# Altium PCB PCB-parking-automation-project-avr-melec-ir.PcbDoc
Units mm, origin at the board's own origin, x right, y up, seen from the top; angles counter-clockwise.
Board outline 120 x 100 mm, 4 copper layers (Top Layer, Internal Plane 1, Internal Plane 2, Bottom Layer); 31 components, 30 nets, 146 pads, 0 vias.
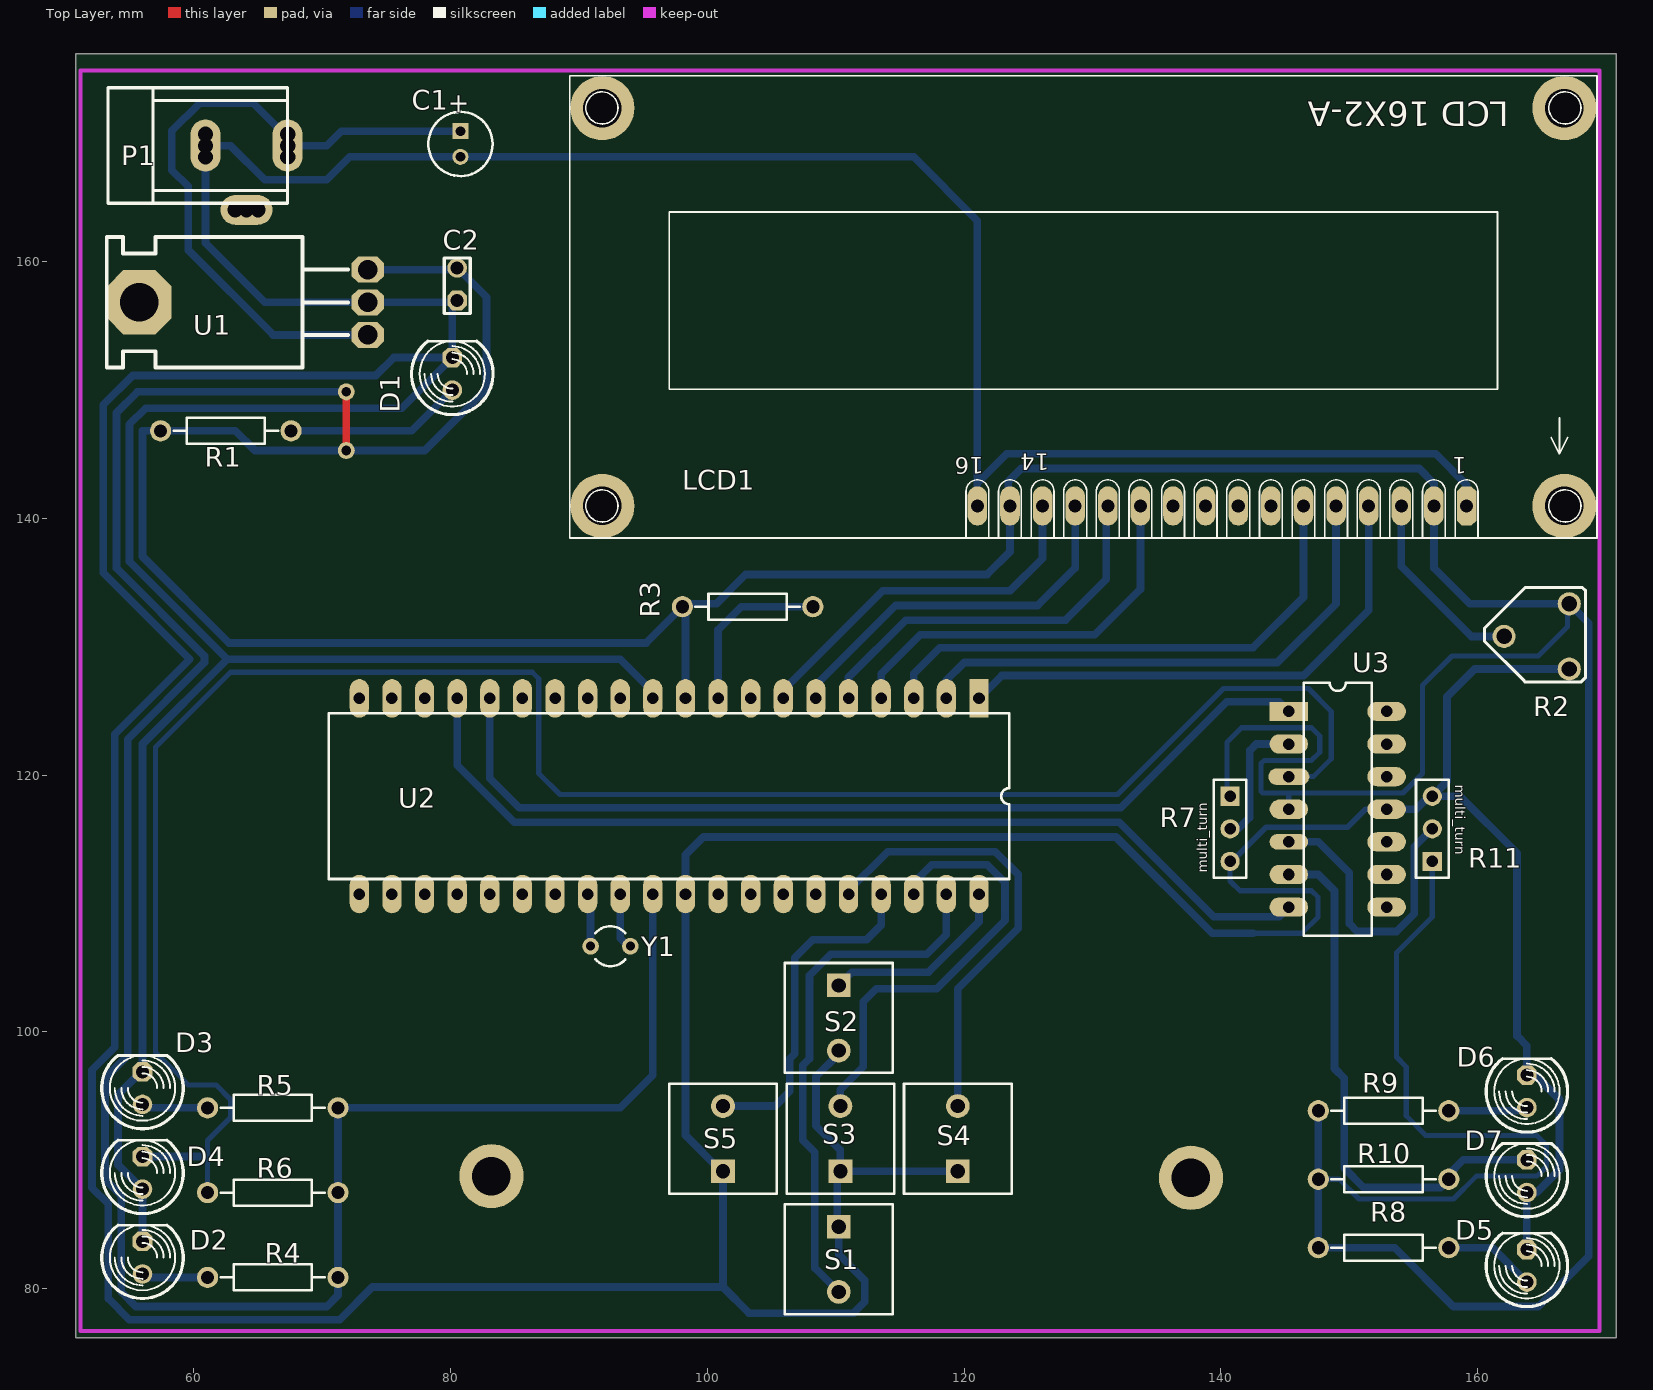
[diagram p0: Top Layer view]
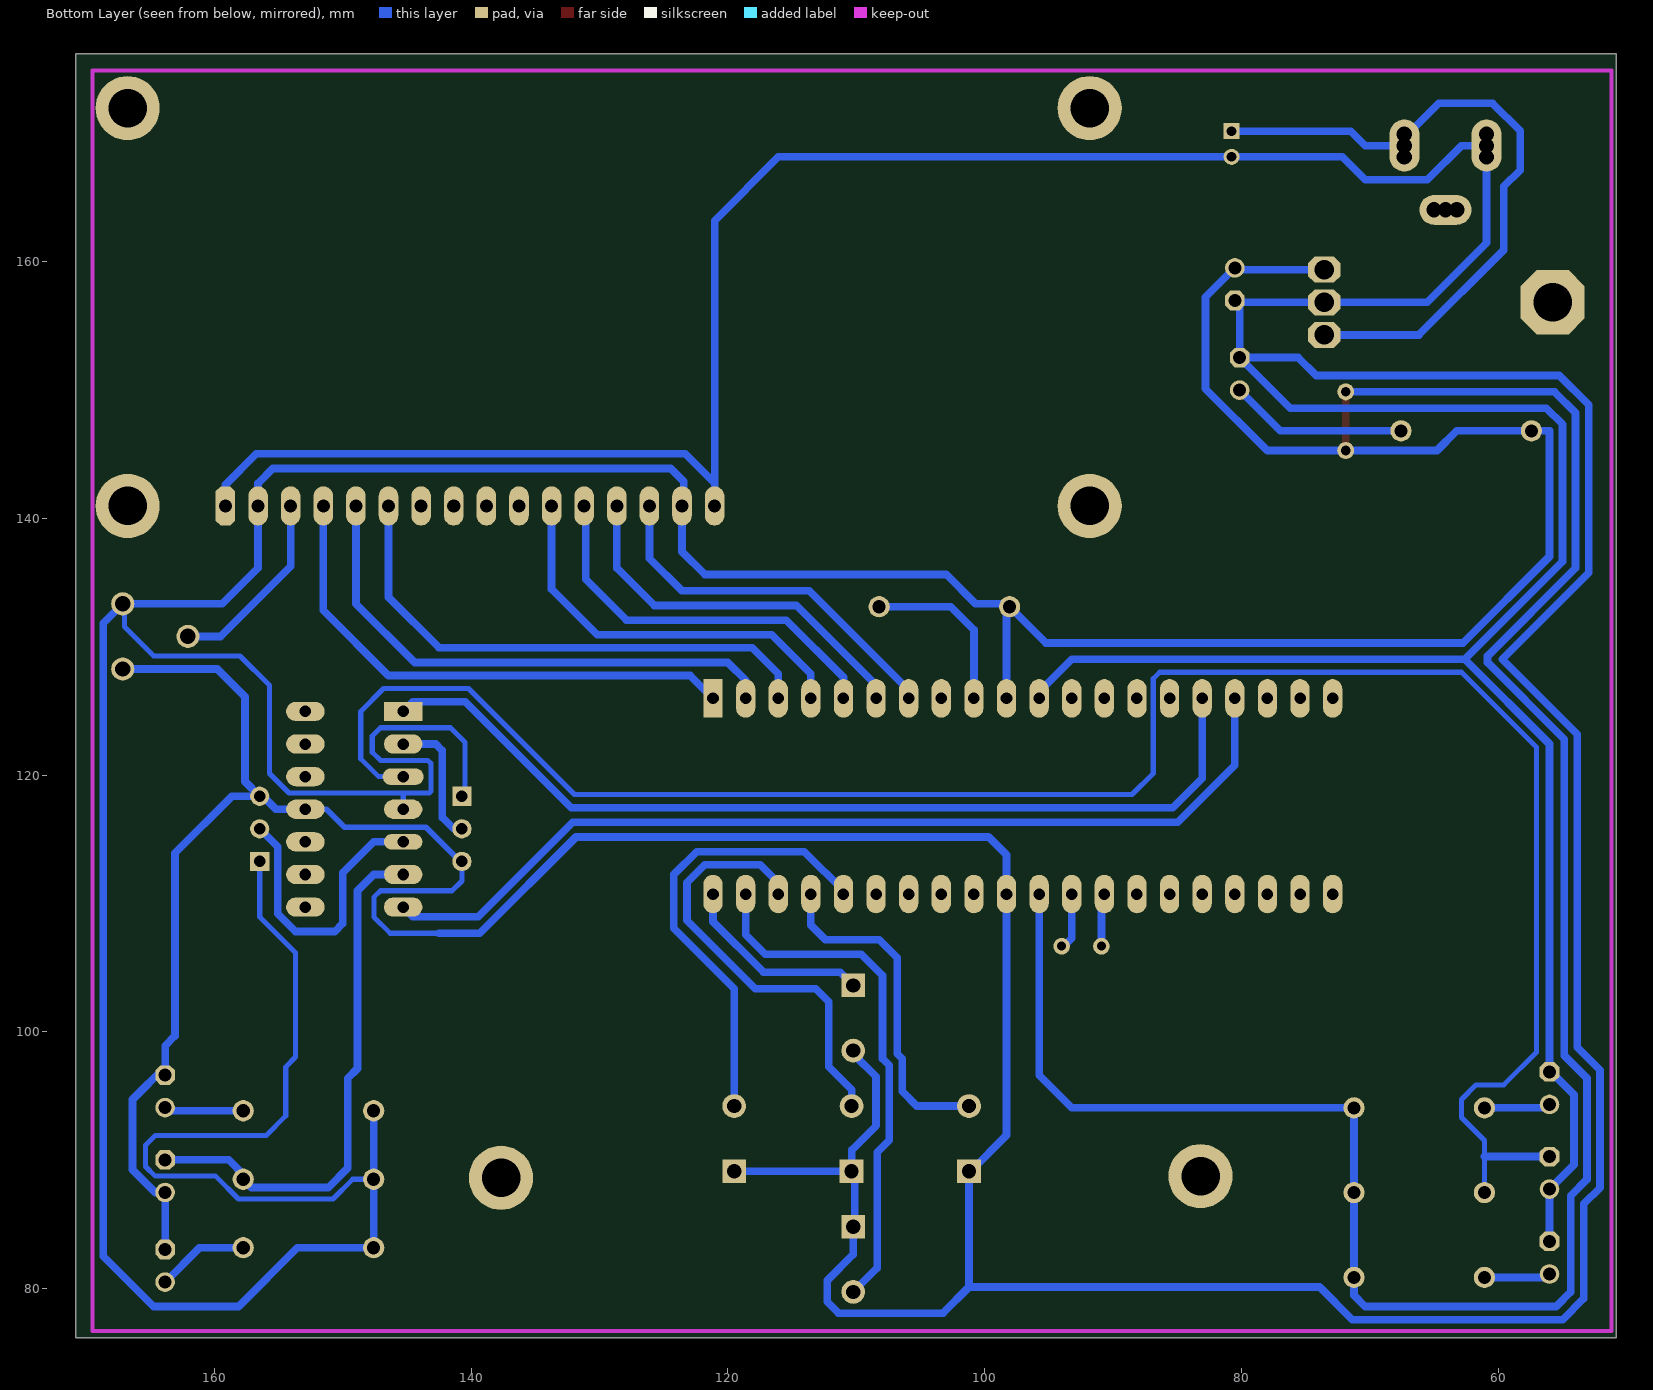
[diagram p1: Bottom Layer view, seen from below]
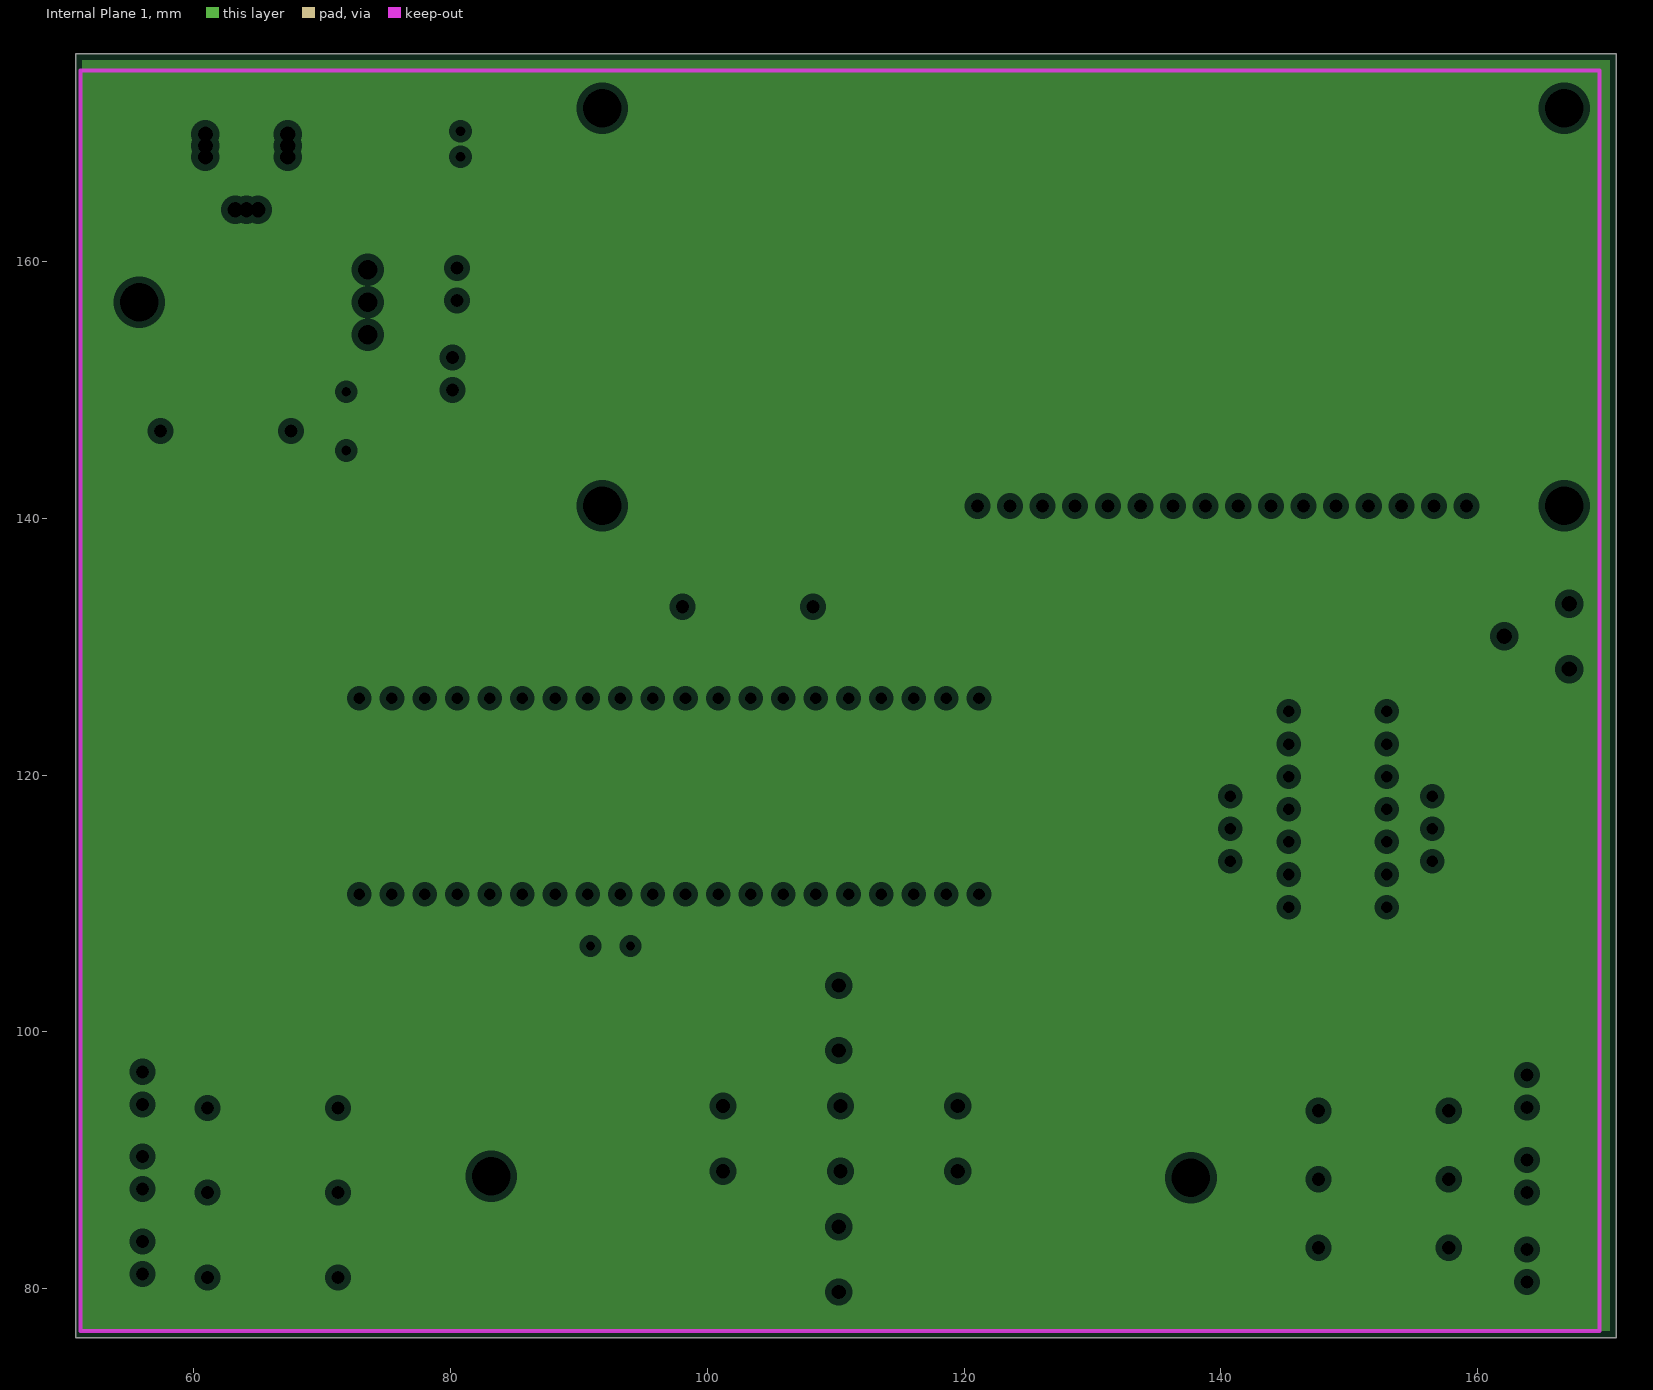
[diagram p2: Internal Plane 1, clearances drawn from the general rule]
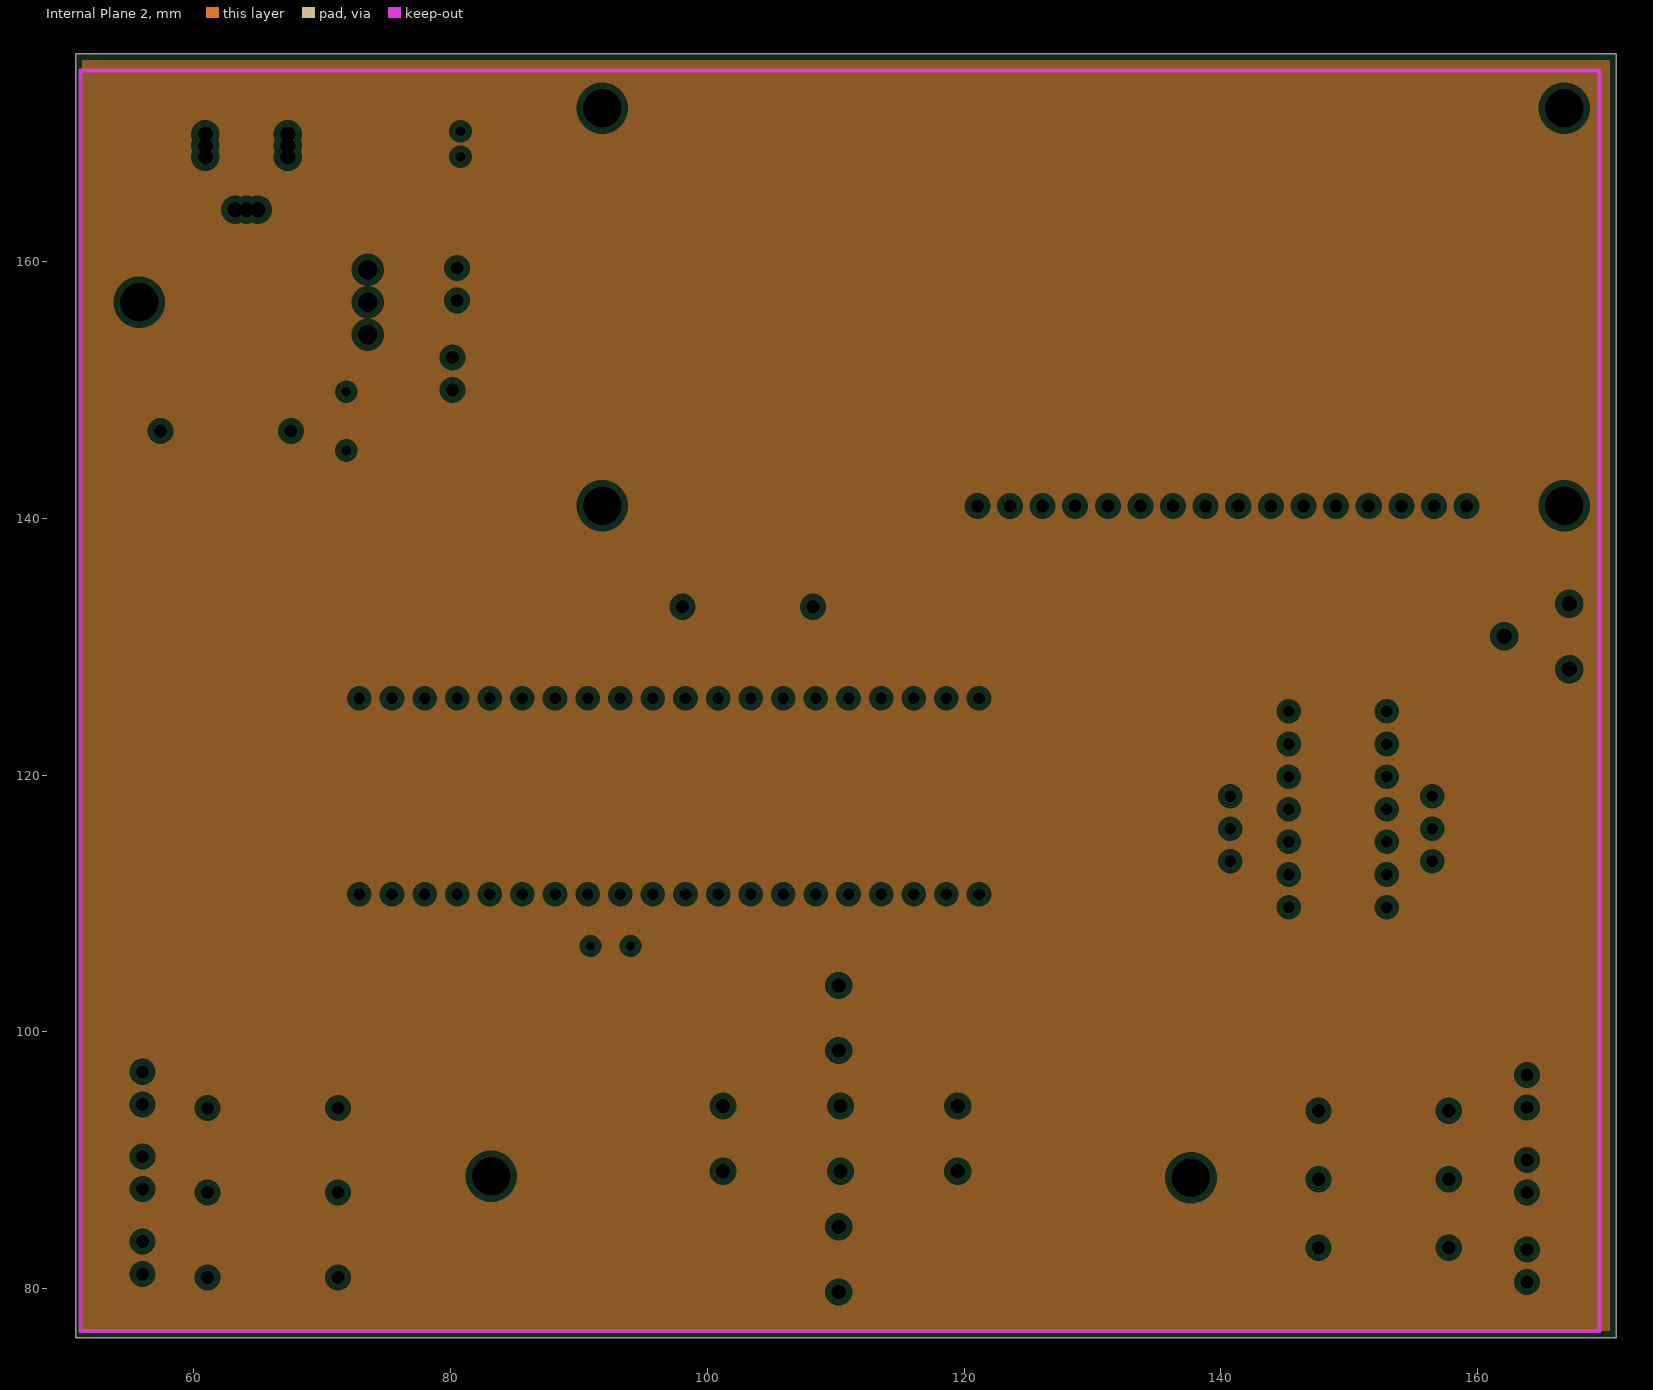
[diagram p3: Internal Plane 2, clearances drawn from the general rule]

## Layer stack, top to bottom
Top Layer: signal copper 0.0356
Dielectric: dielectric 0.32, FR-4, Dk 4.8
Internal Plane 1: plane copper 0.0356
Dielectric: dielectric 0.32, FR-4, Dk 4.8
Internal Plane 2: plane copper 0.0356
Dielectric: dielectric 0.32, FR-4, Dk 4.8
Bottom Layer: signal copper 0.0356

## Board outline
50.8,76.2 170.8,76.2 170.8,176.2 50.8,176.2

## Design rules (kind name [scope] priority, off if disabled: settings)
Clearance [All] p1: gap=0.3
ComponentClearance [All] p1: gap=0.254 collisioncheckmode=3 verticalgap=0.254
HoleSize [All] p1: absolutevalues=TRUE maxlimit=9.54 minlimit=0.025 maxpercent=80.000 minpercent=20.000
PlaneClearance [All] p1: clearance=0.508
PlaneConnect [All] p1: planeconnectstyle=Relief reliefexpansion=0.508 reliefentries=4 reliefconductorwidth=0.254 reliefairgap=0.254
PolygonConnect [All] p1: connectstyle=Relief reliefconductorwidth=0.254 reliefentries=4 polygonreliefangle="90 Angle"
RoutingVias [All] p1: holewidth=0.6 width=1 viastyle="Through Hole" minholewidth=0.711 minwidth=1.27 maxholewidth=0.711 maxwidth=1.27
SolderMaskExpansion [All] p1: expansion=0.102
TestPointUsage [All] p1: valid=0 allowmultiple=FALSE
Testpoint [All] p1: side=15 testpointundercomponent=TRUE minsize=1.016 maxsize=2.54 preferedsize=1.524 minholesize=0 maxholesize=1.016 preferedholesize=0.813 testpointgrid=0.025 style=1023 order=0123456789
Width [All] p1: maxlimit=1 minlimit=0.2 preferedwidth=0.6
15 further rules are at their usual default settings.

## Components (designator, comment, footprint, x,y, rotation, side; value= is the part's Value field where it differs from the comment)
C1 "Cap Pol1" B 80.772,169.164 r270 top
C2 "Cap" My_cap100n 80.518,158.242 r90 top
D1 "LED" MY_LED5MM 80.137,151.257 r90 top
D2 "LED" MY_LED5MM 56.007,82.423 r90 top
D3 "LED" MY_LED5MM 56.007,95.631 r90 top
D4 "LED" MY_LED5MM 56.007,89.027 r90 top
D5 "LED" MY_LED5MM 163.83,81.788 r90 top
D6 "LED" MY_LED5MM 163.83,95.377 r90 top
D7 "LED" MY_LED5MM 163.83,88.773 r90 top
LCD1 "LCD 16X2" "My_LCD 16x2-A" 159.131,140.97 r180 top
P1 "jack-adaptor" jack 63.881,169.037 r270 top
R1 "1k" My_axial-0.4 62.484,146.812 r180 top
R2 "RPot" MY_TRIM_POT 164.719,127.762 r180 top
R3 "1k" My_axial-0.4 103.124,133.109 r180 top
R4 "1k" My_axial-0.4 66.167,80.899 r0 top
R5 "1k" My_axial-0.4 66.167,94.107 r0 top
R6 "1k" My_axial-0.4 66.167,87.503 r0 top
R7 "Multi_turn" multi_turn_1 140.716,115.824 r90 top
R8 "1k" My_axial-0.4 152.654,83.185 r180 top
R9 "1k" My_axial-0.4 152.654,93.853 r180 top
R10 "1k" My_axial-0.4 152.654,88.519 r180 top
R11 "Multi_turn" multi_turn_1 156.464,115.824 r270 top
S1 "SW-PB" sw_push_button 116.84,81.28 r180 top
S2 "SW-PB" sw_push_button 116.84,100.076 r180 top
S3 "SW-PB" sw_push_button 103.759,92.71 r0 top
S4 "SW-PB" sw_push_button 112.903,92.71 r0 top
S5 "SW-PB" sw_push_button 94.615,92.71 r0 top
U1 "7805" My_TO-220 73.533,154.305 r90 top
U2 "ATmega32-16PI" 40P6 97.028,118.364 r180 top
U3 "LM324AN" N14A 149.098,117.348 r270 top
Y1 "XTAL" R38 92.456,106.68 r270 top

## Footprints (in the part's own frame and the unit in brackets; to place one, negate y for a bottom-side part, rotate by r counter-clockwise, add the part's x,y. Pads: shape width x height; smd on the part's side, far side on the other; paste and mask are expansions set on the pad)
40P6 [mm] "DIP; 40 Leads; Row Spacing 15.24 mm; Pitch 2.54 mm"
  rect 1.5x3 hole 0.9: 1(-24.13,-7.62)
  oval 1.5x3 hole 0.9: 2(-21.59,-7.62) 3(-19.05,-7.62) 4(-16.51,-7.62) 5(-13.97,-7.62) 6(-11.43,-7.62) 7(-8.89,-7.62) 8(-6.35,-7.62) 9(-3.81,-7.62) 10(-1.27,-7.62) 11(1.27,-7.62) 12(3.81,-7.62) 13(6.35,-7.62) 14(8.89,-7.62) 15(11.43,-7.62) 16(13.97,-7.62) 17(16.51,-7.62) 18(19.05,-7.62) 19(21.59,-7.62) 20(24.13,-7.62) 21(24.13,7.62) 22(21.59,7.62) 23(19.05,7.62) 24(16.51,7.62) 25(13.97,7.62) 26(11.43,7.62) 27(8.89,7.62) 28(6.35,7.62) 29(3.81,7.62) 30(1.27,7.62) 31(-1.27,7.62) 32(-3.81,7.62) 33(-6.35,7.62) 34(-8.89,7.62) 35(-11.43,7.62) 36(-13.97,7.62) 37(-16.51,7.62) 38(-19.05,7.62) 39(-21.59,7.62) 40(-24.13,7.62)
  silkscreen extent -26.5,-6.45 26.5,6.45
B [mm] "Capacitor, Electrolytic, Radial; Body 5 x 6.8 mm (Dia.xH typ); Pin Spacing 2 mm (typ)"
  rect 1.25x1.25 hole 0.75: 1(-1,0)
  round 1.25 hole 0.75: 2(1,0)
  silkscreen extent -2.5,-2.5 2.5,2.5
jack [mil] "jack"
  round 47 hole 47: 1(-35,135) 1(35,135) 3(-35,-117) 3(35,-117)
  oval 160x92 hole 47: 1(0,135) 3(0,-117)
  round 47.01 hole 47.01: 2(197.01,-25.98) 2(197.01,44.02)
  oval 92.01x160 hole 47.01: 2(197.01,9.02)
  silkscreen extent -177,-416 177,135
multi_turn_1 [mm] "multi_turn_1"
  rect 1.5x1.5 hole 0.9: 1(2.54,0)
  round 1.5 hole 0.9: 2(-2.54,0) 3(0,0)
  silkscreen extent -3.81,-1.27 3.81,1.27
My_axial-0.4 [mil]
  round 65 hole 40: 1(-200.5,-0.5) 2(199.5,-0.5)
  silkscreen extent -160,-41 160,40
My_cap100n [mil]
  oct 60x60 hole 40: 1(-50,0)
  round 60 hole 40: 2(50,0)
  silkscreen extent -90,-40 80,40
"My_LCD 16x2-A" [mil]
  round 196.85 hole 118.11: 0(-300,0) 1(-300,-1220) 2(2650,0) 3(2650,-1220)
  oct 60x120 hole 40: 1(0,0)
  oval 60x120 hole 40: 2(100,0) 3(200,0) 4(300,0) 5(400,0) 6(500,0) 7(600,0) 8(700,0) 9(800,0) 10(900,0) 11(1000,0) 12(1100,0) 13(1200,0) 14(1300,0) 15(1400,0) 16(1500,0)
  silkscreen extent -400,-1319 2750,98
MY_LED5MM [mil]
  round 60 hole 40: A(-50,0)
  oct 60x60 hole 40: K(50,0)
  silkscreen extent -125,-125 100,125
My_TO-220 [mil]
  oct 196.85x196.85 hole 118.11: 0(99.49,699.49)
  oct 80x100 hole 60: 1(-0.5,-0.5) 2(99.5,-0.5) 3(199.5,-0.5)
  silkscreen extent -101,60 300,800
MY_TRIM_POT [mm]
  round 1.8 hole 1.2: 1(-2.413,-0.508) 2(-2.413,-5.588) 3(2.667,-3.048)
  silkscreen extent -3.68,-6.86 4.19,0.51
N14A [mm] "DIP; 14 Leads; Row Spacing 7.62 mm; Pitch 2.54 mm"
  rect 1.5x3 hole 0.9: 1(-7.62,-3.81)
  oval 1.5x3 hole 0.9: 2(-5.08,-3.81) 4(0,-3.81) 6(5.08,-3.81) 7(7.62,-3.81) 8(7.62,3.81) 9(5.08,3.81) 10(2.54,3.81) 11(0,3.81) 12(-2.54,3.81) 13(-5.08,3.81) 14(-7.62,3.81)
  oval 1.3x3.2 hole 0.9: 3(-2.54,-3.81)
  oval 1.2x3 hole 0.9: 5(2.54,-3.81)
  silkscreen extent -9.85,-2.65 9.85,2.65
R38 [mm] "Crystal, Thru-Hole; 2 Leads; Body 3.1 x 8.2 mm (Dia.xH)"
  round 1.3 hole 0.7: 1(0,1.55) 2(0,-1.55)
  silkscreen extent -1.55,-1.19 1.55,1.17
sw_push_button [mm]
  rect 1.85x1.85 hole 1.1: 1(6.604,-3.556)
  round 1.85 hole 1.1: 2(6.604,1.524)
  silkscreen extent 2.41,-5.3 10.79,3.26

## Part data
C1: "Polarized Capacitor (Radial)"
C2: library part "Cap ceramic", "CAP-100Nf"
D1 D2 D3 D4 D5 D6 D7: "Typical INFRARED GaAs LED"
LCD1: "LCD 16X2 Character lcd"
P1: library part "Header 3", "Header, 3-Pin"
R1 R3 R4 R5 R6 R8 R9 R10: library part Res, "resistor 1/4 wat"
R2: library part RPotSMD, "Potentiometer"
R7 R11: "Potentiometer"
S1 S2 S3 S4 S5: "Switch"
U1: "Regulator"
U2: "8-Bit AVR Microcontroller with 32K Bytes of In-System Programmable Flash Memory"
U3: "Low-Power Quad Operational Amplifier"
Y1: "Crystal Oscillator"

## Free pads (board coordinates)
  round 1.324 hole 0.762: 0(71.882,149.86) 1(71.882,145.288)
  round 5 hole 3: 0(137.668,88.646) 1(83.185,88.773)

## Nets (pads, with @x,y where several pads share a name; then routed paths per layer and width w, separated by ;. In a path a pad name is that pad's centre, name@x,y a point inside that pad or via, vN(x,y) a via of type N, cw(c..) or ccw(c..) an arc to the next point about the centre after c; other vN are vias at no path point)
DB4: LCD1.11 U2.4 | length 31.3
  Bottom Layer w0.6: U2.4 113.538,127.889 116.586,130.937 130.175,130.937 133.731,134.493 LCD1.11
DB5: LCD1.12 U2.5 | length 30.3
  Bottom Layer w0.6: U2.5 110.998,127.635 115.443,132.08 127.889,132.08 131.064,135.255 LCD1.12@131.064,140.716
DB6: LCD1.13 U2.6 | length 29.6
  Bottom Layer w0.6: U2.6 108.458,127 114.681,133.223 125.73,133.223 128.651,136.144 LCD1.13@128.651,140.716
DB7: LCD1.14 U2.7 | length 29.2
  Bottom Layer w0.6: U2.7 105.918,126.619 113.665,134.366 123.571,134.366 126.111,136.906 LCD1.14
E: LCD1.6 U2.3 | length 41.8
  Bottom Layer w0.6: U2.3 116.078,127.889 118.11,129.921 142.494,129.921 146.431,133.858 LCD1.6
GND: C1.2 C2.1 D1.K D2.K D3.K D4.A D5.K D6.K D7.A LCD1.1@159.131,140.97 LCD1.16 P1.3 R2.1 R7.2 R11.2 S1.1 S2.2 S3.1 S4.1 S5.1 U1.2 U2.11 U2.31 U3.11 | length 668
  Bottom Layer w0.4: R7.2 140.716,111.76 141.478,110.998 147.066,110.998 147.574,110.49 147.574,108.966 146.304,107.696 142.494,107.696
  Bottom Layer w0.45: R7.2 140.843,113.284 143.51,115.951 149.86,115.951 151.257,117.348 U3.11
  Bottom Layer w0.6: D2.K D4.A 54.102,89.662 54.102,95.123 D3.K@56.007,97.028 ; D3.K 56.007,122.428 62.611,129.032 ; P1.3@60.909,168.148 60.909,161.468 65.532,156.845 C2.1@80.391,156.845 ; P1.3@60.909,169.037 62.865,169.037 65.532,166.37 70.358,166.37 72.152,168.164 116.062,168.164 121.031,163.195 LCD1.16 ; C2.1 80.137,156.591 D1.K ; U2.11 95.758,126.492 93.218,129.032 62.611,129.032 ; U2.31@98.298,110.49 98.298,91.948 101.092,89.154 S5.1 101.219,80.137 ; U2.31 98.298,113.792 99.695,115.189 131.826,115.189 139.319,107.696 142.494,107.696 ; S1.1@110.109,84.963 S3.1@110.109,89.408 ; S2.2@110.109,98.425 110.109,98.171 108.458,96.52 108.458,92.71 110.363,90.805 S3.1 S4.1 ; S1.1 110.236,82.677 112.268,80.645 112.268,78.994 111.379,78.105 103.251,78.105 101.219,80.137 ; 121.031,142.748 123.317,145.034 156.718,145.034 159.131,142.621 LCD1.1@159.131,141.351 ; R7.2 R7.2@140.716,113.538 ; U3.11@154.178,117.348 155.194,117.348 156.21,118.364 158.623,118.364 163.068,113.919 163.068,99.695 163.83,98.933 D6.K ; R11.2 157.607,119.507 157.607,126.111 159.766,128.27 R2.1 ; D5.K D7.A 164.592,87.503 166.37,89.281 166.37,94.742 D6.K@163.83,97.282 ; 62.611,129.032 54.991,136.652 54.991,147.32 56.261,148.59 76.2,148.59 D1.K ; D1.K 75.565,152.527 74.168,151.13 55.245,151.13 52.959,148.844 52.959,135.763 59.69,129.032 53.848,123.19 53.848,98.806 52.07,97.028 52.07,87.884 53.34,86.614 53.34,79.248 54.991,77.597 71.374,77.597 73.914,80.137 101.219,80.137
INT0: U2.16 U3.1 | length 73.1
  Bottom Layer w0.6: U2.16 83.058,119.761 85.344,117.475 132.207,117.475 140.462,125.73 144.526,125.73 U3.1
INT1: U2.17 U3.7 | length 75
  Bottom Layer w0.6: U2.17 80.518,120.777 84.963,116.332 132.08,116.332 139.446,108.966 144.526,108.966 U3.7@145.161,109.601
NetC1_1: C1.1 P1.1 U1.1 | length 52
  Bottom Layer w0.6: P1.1@67.056,169.037 67.056,169.926 64.643,172.339 60.452,172.339 58.293,170.18 58.293,167.132 59.569,165.856 59.569,160.903 66.18,154.292 U1.1 ; P1.1@67.31,169.037 70.358,169.037 71.485,170.164 C1.1
NetD1_A: D1.A R1.1 | length 13.9
  Bottom Layer w0.6: R1.1 76.975,146.825 D1.A
NetD2_A: D2.A R4.1 | length 5.2
  Bottom Layer w0.6: D2.A 56.274,80.886 R4.1
NetD3_A: D3.A R5.1 | length 5.5
  Bottom Layer w0.6: D3.A@55.753,94.615 56.274,94.094 R5.1
NetD4_K: D4.K R6.1 U3.3 | length 158.5
  Bottom Layer w0.4: R6.1 61.074,91.554 62.865,93.345 62.865,94.742 61.722,95.885 59.563,95.885 57.023,98.425 57.023,122.174 62.865,128.016 86.36,128.016 86.868,127.508 86.868,120.142 88.519,118.491 131.953,118.491 140.208,126.746 146.812,126.746 148.59,124.968 148.59,121.285 147.193,119.888 U3.3
  Bottom Layer w0.6: D4.K@56.274,90.03 D4.K 61.074,90.297
NetD5_A: D5.A R8.1 | length 7.2
  Bottom Layer w0.6: R8.1 161.15,83.198 D5.A
NetD6_A: D6.A R9.1 | length 6.2
  Bottom Layer w0.6: R9.1 163.589,93.866 D6.A
NetD7_K: D7.K R10.1 U3.6 | length 41.6
  Bottom Layer w0.6: U3.6 147.574,112.268 148.844,110.998 148.844,97.155 149.606,96.393 149.606,89.408 151.13,87.884 157.099,87.884 R10.1 ; R10.1@157.747,88.9 158.89,90.043 D7.K
NetLCD1_3: LCD1.3@154.051,140.97 R2.3 | length 15
  Bottom Layer w0.6: LCD1.3@154.051,140.97 154.051,136.271 159.512,130.81 R2.3
NetR7_3: R7.3 U3.2 | length 10.4
  Bottom Layer w0.6: R7.3 141.351,115.824 142.24,116.713 142.24,121.92 142.748,122.428 U3.2
NetR11_3: R11.3 U3.5 | length 22.7
  Bottom Layer w0.6: U3.5 147.574,114.808 149.987,112.395 149.987,108.458 150.622,107.823 153.67,107.823 155.067,109.22 155.067,114.427 R11.3
RESET: R3.1 U2.9 | length 13.5
  Bottom Layer w0.6: U2.9 100.838,131.318 102.641,133.121 R3.1
RS: LCD1.4 U2.1 | length 41.3
  Bottom Layer w0.6: U2.1 122.936,127.762 146.431,127.762 151.511,132.842 LCD1.4
RW: LCD1.5 U2.2 | length 41.8
  Bottom Layer w0.6: U2.2 118.618,127.381 120.015,128.778 144.399,128.778 148.971,133.35 LCD1.5
SW_1: S2.1 U2.40 | length 15.1
  Bottom Layer w0.6: S2.1 111.252,104.648 117.221,104.648 121.158,108.585 U2.40
SW_2: S1.2 U2.39 | length 41.2
  Bottom Layer w0.6: S1.2 108.368,81.624 108.368,90.641 107.442,91.567 107.442,97.409 107.95,97.917 107.95,104.394 109.601,106.045 117.094,106.045 118.618,107.569 U2.39
SW_3: S3.2 U2.38 | length 34.6
  Bottom Layer w0.6: S3.2 110.363,95.504 112.141,97.282 112.141,102.362 113.157,103.378 117.856,103.378 123.19,108.712 123.19,111.633 121.793,113.03 117.475,113.03 116.078,111.633 U2.38
SW_4: S5.2 U2.37 | length 26.4
  Bottom Layer w0.6: S5.2 105.283,94.234 106.426,95.377 106.426,97.917 106.807,98.298 106.807,105.791 108.204,107.188 112.395,107.188 113.538,108.331 U2.37
SW_5: S4.2 U2.36 | length 35.4
  Bottom Layer w0.6: U2.36@110.871,110.871 114.046,114.046 122.428,114.046 124.206,112.268 124.206,108.077 119.507,103.378 S4.2
TOSC1: U2.28 Y1.2 | length 4.2
  Bottom Layer w0.6: U2.28 90.906,110.516 Y1.2
TOSC2: U2.29 Y1.1 | length 4.5
  Bottom Layer w0.6: U2.29 93.218,107.315 93.853,106.68 Y1.1
VCC: C2.2 LCD1.2@156.591,140.97 LCD1.15 pad.0@71.882,149.86 pad.1@71.882,145.288 R1.2 R2.2 R3.2 R4.2 R5.2 R6.2 R7.1 R8.2 R9.2 R10.2 R11.1 U1.3 U2.10 U2.30 U3.4 | length 561.7
  Top Layer w0.6: pad.1@71.882,145.288 pad.0@71.882,149.86
  Bottom Layer w0.4: R7.1 140.716,118.618 140.462,118.872 140.462,122.555 141.605,123.698 147.066,123.698 147.701,123.063 147.701,121.793 147.066,121.158 143.383,121.158 143.129,120.904 143.129,118.745 143.256,118.618 ; 143.383,118.618 154.178,118.618 155.702,120.142 155.702,127 157.988,129.286 164.719,129.286 167.005,131.572 R2.2@167.005,133.096 ; U3.4 145.288,118.618 ; R10.2 149.212,88.532 150.749,86.995 158.115,86.995 159.893,88.773 164.592,88.773 165.354,89.535 165.354,91.186 164.592,91.948 155.956,91.948 154.432,93.472 154.432,97.282 153.67,98.044 153.67,106.172 156.464,108.966 R11.1
  Bottom Layer w0.6: R5.2@70.993,94.107 71.234,93.866 71.234,79.489 70.358,78.613 55.499,78.613 54.356,79.756 54.356,87.249 53.086,88.519 53.086,96.393 54.864,98.171 54.864,122.809 60.833,128.778 60.833,129.286 53.975,136.144 53.975,148.209 55.626,149.86 pad.0@71.882,149.86 ; R5.2 93.205,94.094 95.758,96.647 U2.30 ; U1.3 C2.2@80.378,159.372 ; C2.2 82.804,157.226 82.804,150.114 77.978,145.288 64.77,145.288 63.233,146.825 56.007,146.825 56.007,137.033 62.738,130.302 95.25,130.302 R3.2@98.057,133.109 ; R3.2@98.171,133.35 100.711,133.35 102.997,135.636 121.793,135.636 123.571,137.414 LCD1.15 ; U2.10 R3.2@98.298,133.109 ; LCD1.15@123.444,141.351 123.444,142.875 124.46,143.891 155.448,143.891 156.591,142.748 156.591,136.144 159.385,133.35 R2.2 168.656,131.826 168.656,82.55 164.719,78.613 158.115,78.613 153.53,83.198 R8.2 ; R8.2@147.447,83.439 147.587,83.579 R9.2
pads on no net: LCD1.0 LCD1.1@166.751,171.958 LCD1.2@91.821,140.97 LCD1.3@91.821,171.958 LCD1.7 LCD1.8 LCD1.9 LCD1.10 P1.2 U1.0 U2.8 U2.12 U2.13 U2.14 U2.15 U2.18 U2.19 U2.20 U2.21 U2.22 U2.23 U2.24 U2.25 U2.26 U2.27 U2.32 U2.33 U2.34 U2.35 U3.8 U3.9 U3.10 U3.12 U3.13 U3.14

## Polygon pours and split planes (outlines as drawn)
no net on Internal Plane 1 (split plane): 170.8,76.2 50.8,76.2 50.8,176.2 170.8,176.2
no net on Internal Plane 2 (split plane): 170.8,76.2 50.8,76.2 50.8,176.2 170.8,176.2

## Keep-outs
Keep-Out Layer:
  lines w0.3: 51.181,76.708 51.181,174.9 169.5,174.9 169.5,76.708 51.181,76.708

## Text inside footprints (layer, text, board x,y; h text height)
C1: Top Overlay "+" at 80.022,173.139 h1.5 r270
LCD1: Top Overlay "14" at 126.619,145.034 h1.27 r180; Top Overlay "1" at 159.131,144.78 h1.27 r180; Top Overlay "16" at 121.539,144.78 h1.27 r180; Top Overlay "LCD 16X2-A" at 162.433,172.466 h1.91 r180
R7: Top Overlay "multi_turn" at 138.938,112.395 h0.77 r90
R11: Top Overlay "multi_turn" at 158.242,119.253 h0.77 r270